# Altium PCB PCB1.PcbDoc
Units mm, origin at the board's own origin, x right, y up, seen from the top; angles counter-clockwise.
Board outline 100 x 70 mm, 2 copper layers (Top Layer, Bottom Layer); 22 components, 25 nets, 103 pads, 10 vias.
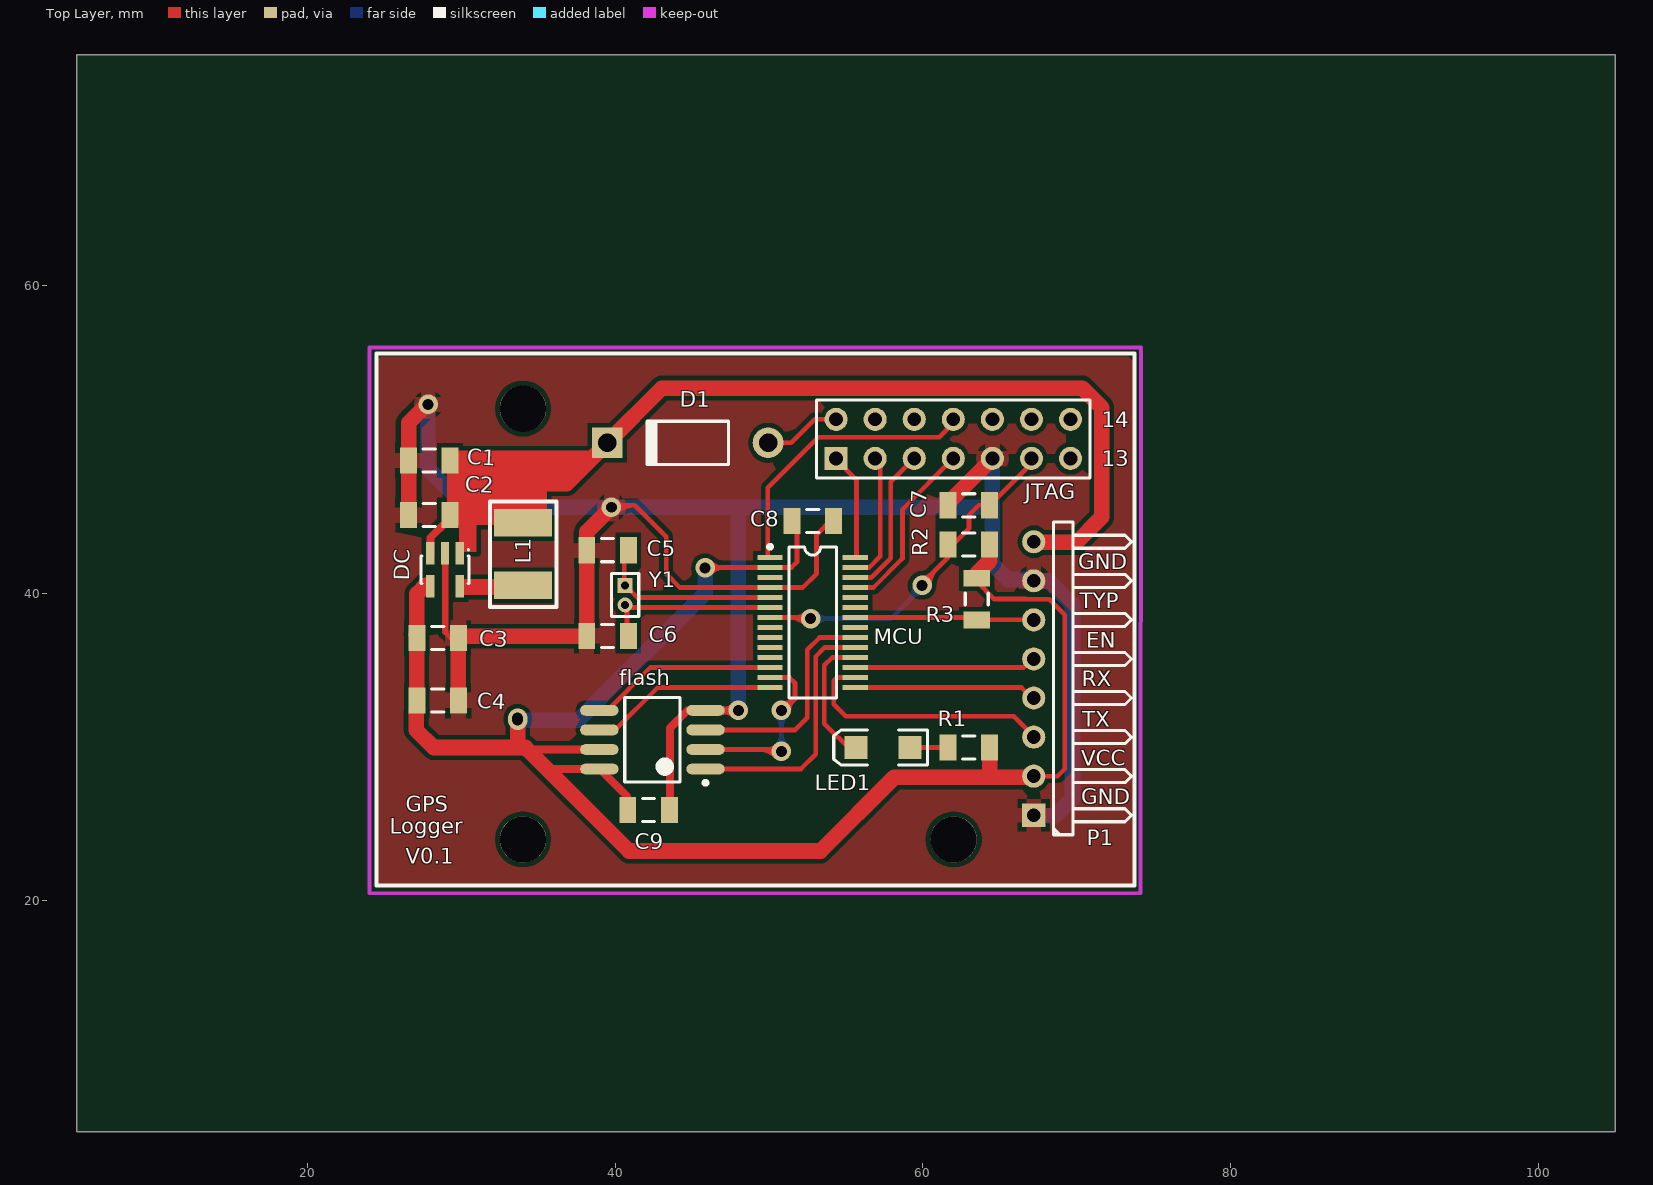
[diagram p0: Top Layer view]
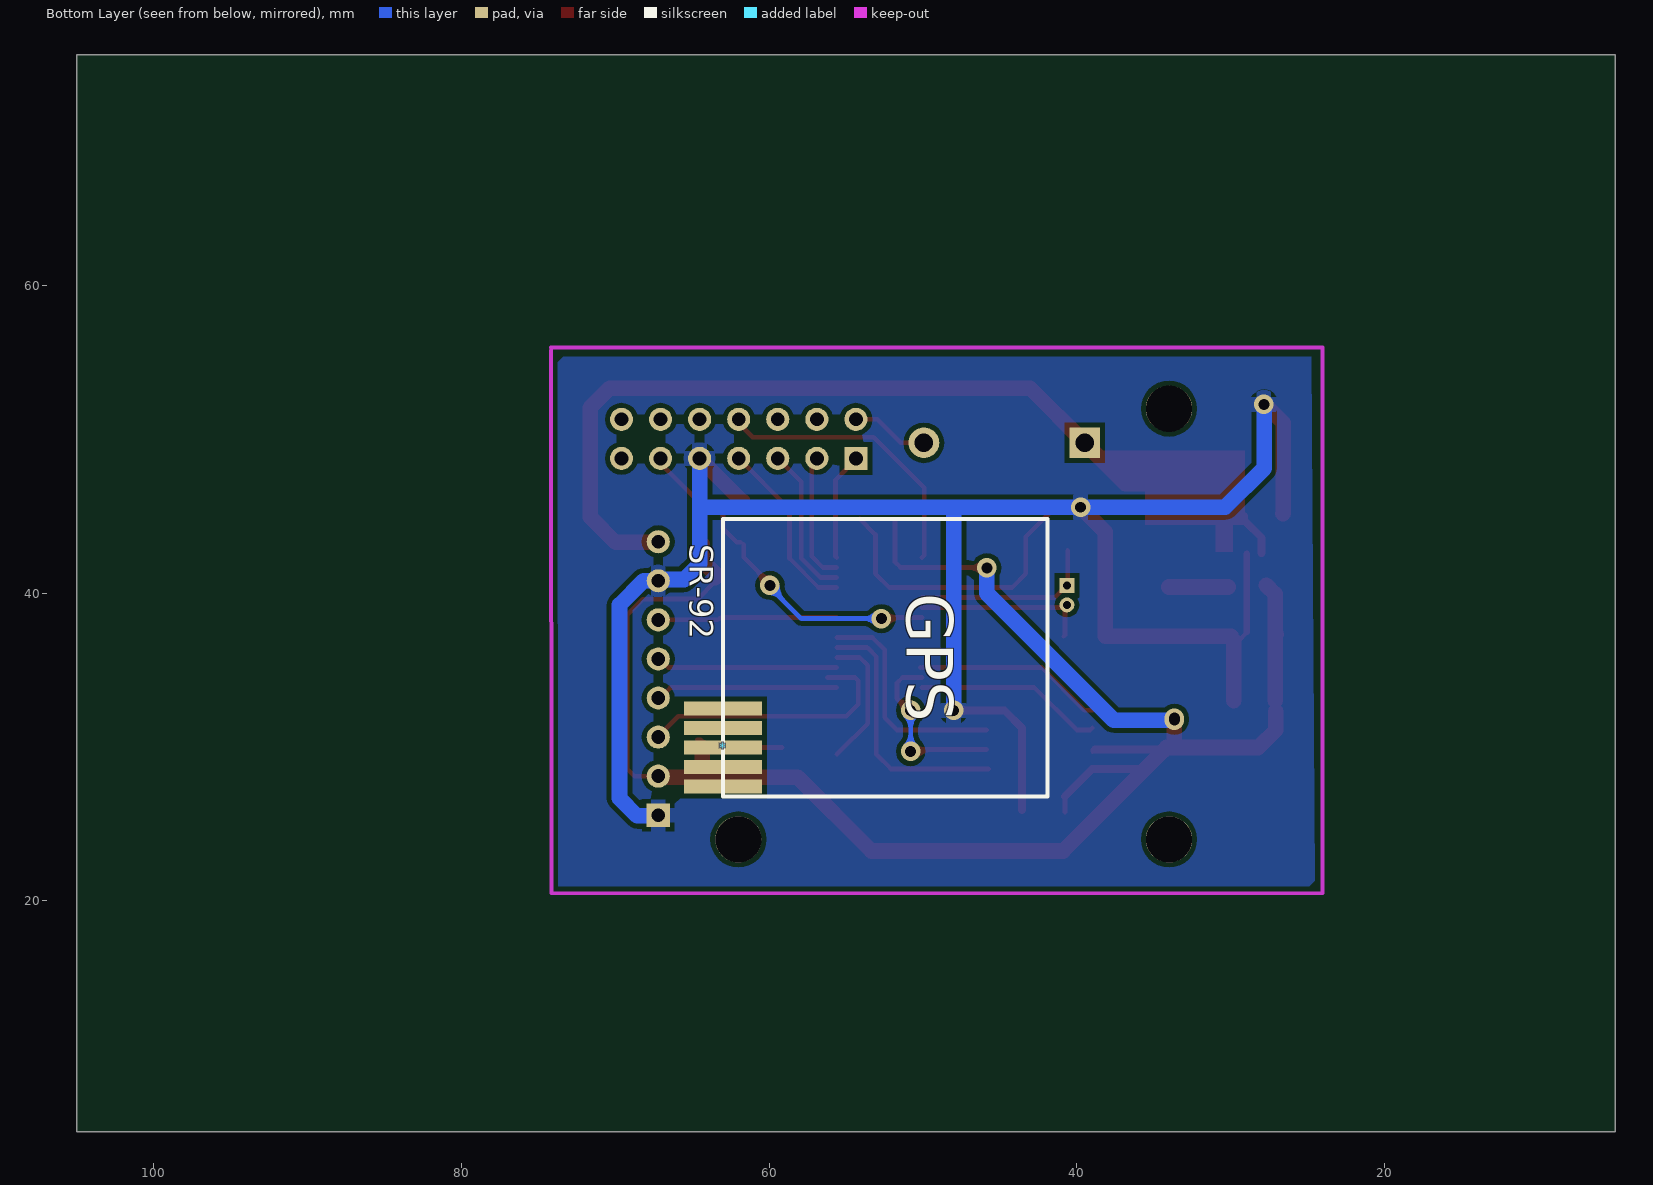
[diagram p1: Bottom Layer view, seen from below]

## Layer stack, top to bottom
Top Layer: signal copper 0.0356
Dielectric: dielectric 0.32, FR-4, Dk 4.8
Bottom Layer: signal copper 0.0356

## Board outline
5,75 105,75 105,5 5,5

## Design rules (kind name [scope] priority, off if disabled: settings)
Clearance Clearance_1 [(InNet('GND'))] p1: gap=0.305
Clearance [All] p2: gap=0.254
PolygonConnect [All] p1: connectstyle=Relief reliefconductorwidth=1 reliefentries=4 polygonreliefangle="90 Angle"
RoutingVias [All] p1: holewidth=0.711 width=1.27 viastyle="Through Hole" minholewidth=0.711 minwidth=1.27 maxholewidth=0.711 maxwidth=1.27
SilkscreenOverComponentPads [All] p1: minsilkscreentomaskgap=0.254
SolderMaskExpansion [All] p1: expansion=0.102
Width [All] p1: maxlimit=2.54 minlimit=0.305 preferedwidth=0.305 minimp=50.000000 maximp=50.000000 favimp=50.000000
27 further rules are at their usual default settings.

## Components (designator, comment, footprint, x,y, rotation, side; value= is the part's Value field where it differs from the comment)
* "Comment" SR-92 62.992,27.432 r270 bottom
C1 "" CAPC3216L 27.915,48.641 r0 top
C2 "" CAPC3216L 27.915,45.085 r0 top
C3 "" CAPC3216L 28.448,37.084 r180 top
C4 "" CAPC3216L 28.448,33.02 r180 top
C5 "" CAPC3216L 39.497,42.799 r0 top
C6 "" CAPC3216L 39.497,37.211 r0 top
C7 "" CAPC3216L 62.992,45.72 r0 top
C8 "" CAPC3216L 52.832,44.704 r180 top
C9 "" CAPC3216L 42.164,25.908 r0 top
D1 "Header 2" DO-41 44.704,49.784 r180 top (schematic designator J1)
DC "TPS61097-33" DBV005 28.931,41.529 r180 top
flash "AT25DF321A" 8S2_M 42.418,30.48 r180 top
JTAG "Debug" HDR2X7 54.356,48.768 r0 top
L1 "DO3314-103MLC" DO3314 34.011,42.545 r90 top
LED1 "LED2" DSO-F2/D6.1 57.404,29.972 r180 top
MCU "MSP430F21X2" PW028 52.832,38.1 r270 top
P1 "Header 8H" HDR1X8H 67.207,25.57 r90 top
R1 "Res3" RESC3216L 62.992,29.972 r180 top
R2 "Res3" RESC3216L 62.992,43.18 r0 top
R3 "Res3" RESC3216L 63.5,39.624 r90 top
Y1 "16M" "DCO - 2" 40.64,40.513 r270 top

## Footprints (in the part's own frame and the unit in brackets; to place one, negate y for a bottom-side part, rotate by r counter-clockwise, add the part's x,y. Pads: shape width x height; smd on the part's side, far side on the other; paste and mask are expansions set on the pad)
8S2_M [mm] "8-Pin Small Outline Package 1.27 mm Pitch, IPC Low Density"
  oval 2.5x0.7 smd: 1(-3.45,1.905) 2(-3.45,0.635) 3(-3.45,-0.635) 4(-3.45,-1.905) 5(3.45,-1.905) 6(3.45,-0.635) 7(3.45,0.635) 8(3.45,1.905)
  silkscreen extent -3.57,-2.75 1.8,2.93, body extent -2.73,-2.75 2.73,2.75, height 2.03
CAPC3216L [mm] "Chip Capacitor, Body 3.2x1.6mm, IPC High Density"
  rect 1.1x1.7 smd: 1(-1.35,0) 2(1.35,0)
  silkscreen extent -0.4,-0.75 0.4,0.75, body extent -1.7,-0.9 1.7,0.9, height 1.3
DBV005 [mm] "SOT-23/SC-74A; 5 Leads; Body 3 x 3 mm, inc. leads (LxW max)"
  rect 0.55x1.45 smd: 1(-0.95,-1.075) 2(0,-1.075) 3(0.95,-1.075) 4(0.95,1.075) 5(-0.95,1.075)
  silkscreen extent -1.58,-1.35 1.55,0.9
"DCO - 2" [mil] "D Crystal Oscillator"
  rect 38.05x38.05 hole 20: 1(0,0)
  round 38.05 hole 20: 2(50,0)
  silkscreen extent -30,-35 80,35
DO3314 [mil]
  rect 70x148 smd: 1(80,0) 2(-80,0)
  silkscreen extent -135,-85 135,85
DO-41 [mm] "Diode, Axial; Body 5.2 x 2.7 mm (LxDia. max), Lead Dia. 0.86 mm (max)"
  round 2 hole 1.2: 1(-5.23,0)
  rect 2x2 hole 1.2: 2(5.23,0)
  silkscreen extent -2.65,-1.4 2.75,1.4
DSO-F2/D6.1 [mm] "SMT LED; 2 Flat Leads"
  rect 1.5x1.5 smd: 1(-1.75,0) 2(1.75,0)
  silkscreen extent -2.9,-1.15 3.2,1.15
HDR1X8H [mm] "Connector; Header; 8 Position; Right Angle"
  rect 1.5x1.5 hole 0.9: 1(0,0)
  round 1.5 hole 0.9: 2(2.54,0) 3(5.08,0) 4(7.62,0) 5(10.16,0) 6(12.7,0) 7(15.24,0) 8(17.78,0)
  silkscreen extent -1.27,-6.35 19.05,-1.27
HDR2X7 [mm] "Connector; Header; 7x2 Position"
  rect 1.5x1.5 hole 0.9: 1(0,0)
  round 1.5 hole 0.9: 2(0,2.54) 3(2.54,0) 4(2.54,2.54) 5(5.08,0) 6(5.08,2.54) 7(7.62,0) 8(7.62,2.54) 9(10.16,0) 10(10.16,2.54) 11(12.7,0) 12(12.7,2.54) 13(15.24,0) 14(15.24,2.54)
  silkscreen extent -1.27,-1.27 16.51,3.81
PW028 [mm]
  rect 0.3x1.65 smd: 1(-4.225,-2.775) 2(-3.575,-2.775) 3(-2.925,-2.775) 4(-2.275,-2.775) 5(-1.625,-2.775) 6(-0.975,-2.775) 7(-0.325,-2.775) 8(0.325,-2.775) 9(0.975,-2.775) 10(1.625,-2.775) 11(2.275,-2.775) 12(2.925,-2.775) 13(3.575,-2.775) 14(4.225,-2.775) 15(4.225,2.775) 16(3.575,2.775) 17(2.925,2.775) 18(2.275,2.775) 19(1.625,2.775) 20(0.975,2.775) 21(0.325,2.775) 22(-0.325,2.775) 23(-0.975,2.775) 24(-1.625,2.775) 25(-2.275,2.775) 26(-2.925,2.775) 27(-3.575,2.775) 28(-4.225,2.775)
  silkscreen extent -5.05,-2.9 4.9,1.55
RESC3216L [mm] "Chip Resistor, Body 3.1x1.6mm, IPC High Density"
  rect 1.1x1.7 smd: 1(-1.35,0) 2(1.35,0)
  silkscreen extent -0.4,-0.75 0.4,0.75, body extent -1.68,-0.87 1.68,0.87, height 2.54
SR-92 [mil] "GPS module SR-92"
  rect 36x200 smd: 1(0,0) 2(-50,0) 3(-100,0) 4(-150,0) 5(-200,0)
  silkscreen extent -685,0 25,830

## Part data
*: library part SR-92
C1 C2 C3 C4 C5 C6 C7 C8 C9: library part "Cap Semi", "Capacitor (Semiconductor SIM Model)"
D1: "Header, 2-Pin"
JTAG: library part "Header 7X2", "Header, 7-Pin, Dual row"
L1: library part "Inductor Iron", "Magnetic-Core Inductor"
LED1: "Typical RED, GREEN, YELLOW, AMBER GaAs LED"
P1: "Header, 8-Pin, Right Angle"
R1 R2 R3: "Resistor"
Y1: library part XTAL, "Crystal Oscillator"

## Free pads (board coordinates)
  round 3 hole 3: 1(34,52) 2(34,24) 3(62,24)

## Via types
v1: diameter 1.27, hole 0.711, Top Layer to Bottom Layer, 10 vias

## Nets (pads, with @x,y where several pads share a name; then routed paths per layer and width w, separated by ;. In a path a pad name is that pad's centre, name@x,y a point inside that pad or via, vN(x,y) a via of type N, cw(c..) or ccw(c..) an arc to the next point about the centre after c; other vN are vias at no path point)
CS: flash.1 MCU.19 | length 16.8
  Top Layer w0.305: flash.1@45.741,28.575 flash.1 52.07,28.575 53.035,29.54 53.035,35.89 53.594,36.449 ; 53.62,36.475 MCU.19
GND: C1.1 C2.1 C3.1 C4.1 C5.1 C6.1 C7.1 C8.1 C9.2 DC.2 flash.4 JTAG.9 MCU.4 P1.1 P1.7 | length 160.1
  Top Layer w0.305: DC.2 DC.2@28.946,42.589 ; 28.946,37.48 28.931,37.465 29.515,36.881 C3.1@29.591,36.881 ; C3.1@29.769,36.982 C3.1@29.798,36.953 ; C6.1@37.973,37.186 37.998,37.211 C6.1@38.147,37.36 ; v1@39.751,45.72 41.275,45.72 43.307,43.688 43.307,41.275 44.207,40.375 MCU.4 ; v1@39.877,45.467 cw(c40.487,44.857) 40.487,45.72 ; v1@40.092,45.252 cw(c41.223,44.121) 41.223,45.72 ; v1@40.092,45.934 ccw(c40.609,46.451) 40.609,45.72 ; C9.2 C9.2@43.561,25.908 ; flash.4@45.847,32.385 flash.4 ; MCU.4@50.444,40.375 MCU.4 ; C8.1@54.102,44.831 53.086,43.815 53.086,41.275 52.186,40.375 MCU.4 ; JTAG.9@64.342,48.721 JTAG.9@64.516,48.895 ; JTAG.9@64.516,48.514 JTAG.9 JTAG.9@64.516,48.641
  Top Layer w0.406: 28.946,37.48 DC.2@28.946,42.589
  Top Layer w0.508: C9.2@43.561,25.908 43.561,31.242 44.704,32.385 flash.4 v1(48.006,32.385) ; v1@47.737,32.116 ccw(c47.086,31.465) 47.086,32.385 ccw(c47.086,33.305) v1@47.737,32.654
  Top Layer w1.016: C2.1@26.594,45.187 26.565,45.216 C1.1 26.565,51.076 v1@27.8,52.311 ; C4.1 C3.1@29.798,36.953 ; C3.1@29.972,37.211 37.998,37.211 C6.1 ; C6.1@38.147,37.36 C5.1 38.147,43.989 v1(39.751,45.593) ; C7.1@61.722,45.72 61.722,45.974 JTAG.9 ; JTAG.9@64.643,48.641 JTAG.9 ; JTAG.9@64.643,48.895 JTAG.9 ; P1.7@67.183,40.767 P1.7@67.246,40.831 ; P1.7@67.31,40.767 P1.7@67.246,40.831 ; P1.7@67.31,40.894 P1.7@67.246,40.831
  Bottom Layer w1.016: v1@27.813,52.273 27.813,48.133 30.353,45.593 v1(39.751,45.593) 48.006,45.593 ; v1(48.006,32.385) 48.006,45.593 ; 64.262,45.593 48.006,45.593 ; 64.516,41.91 65.532,40.894 P1.7@67.183,40.894 ; 64.516,42.037 JTAG.9 ; P1.1@67.183,25.527 68.58,25.527 69.723,26.67 69.723,39.243 68.156,40.81 P1.7 ; P1.7@67.207,40.767 P1.7@67.437,40.767
  other v1: 27.838,52.273
GSP_EN: MCU.17 P1.5 | length 11.8
  Top Layer w0.305: MCU.17 66.544,35.175 P1.5@67.132,35.763
JTAG_3.3V: D1.1 JTAG.2 | length 5
  Top Layer w0.305: D1.1 51.435,49.784 52.959,51.308 JTAG.2@54.229,51.308
  Top Layer w1.016: JTAG.2@54.28,51.333 JTAG.2@54.305,51.359
LED1: LED1.2 MCU.18 | length 8.8
  Top Layer w0.305: LED1.2@55.588,29.527 55.399,29.717 53.594,31.521 53.594,35.306 54.113,35.825 MCU.18
MCU_RX: MCU.16 P1.3 | length 17.5
  Top Layer w0.305: MCU.16@56.21,34.525 MCU.16 54.413,34.525 54.204,34.315 54.204,32.791 54.991,32.004 65.913,32.004 P1.3@67.234,30.683
MCU_TX: MCU.15 P1.4 | length 11.9
  Top Layer w0.305: MCU.15 66.404,33.875 67.148,33.131 P1.4@67.158,33.122
NetC5_2: C5.2 MCU.5 Y1.1 | length 12.2
  Top Layer w0.305: Y1.1@40.593,40.386 40.593,40.513 C5.2@40.593,42.799 ; Y1.1 41.428,39.725 MCU.5
NetC6_2: C6.2 MCU.6 Y1.2 | length 11.4
  Top Layer w0.305: Y1.2@40.513,39.243 40.576,39.179 Y1.2@40.681,39.075 ; C6.2 40.767,37.291 40.767,39.075 MCU.6
NetDC_5: DC.5 L1.2 | length 3.9
  Top Layer w1.016: DC.5@30.15,40.411 L1.2@34.011,40.411
NetLED1_1: LED1.1 R1.2 | length 2.3
  Top Layer w0.305: LED1.1 61.29,29.972 R1.2@61.392,29.87
NetMCU_22: 
POWER: C1.2 C2.2 D1.2 DC.1 DC.3 L1.1 P1.8 | length 55.2
  Top Layer w0.406: C2.2@29.058,44.679 C2.2@29.058,45.034
  Top Layer w0.508: DC.3 27.981,43.602 C2.2@29.058,44.679
  Top Layer w1.016: 34.671,47.117 36.83,47.117 39.37,49.657 39.37,49.784 D1.2@39.37,49.911 ; D1.2 43.03,53.34 70.358,53.34 71.628,52.07 71.628,44.958 69.977,43.307 P1.8@67.31,43.307
  Bottom Layer w1.016: P1.8@67.148,43.409 P1.8
RST: C7.2 JTAG.11 MCU.7 R2.1 | length 39.5
  Top Layer w0.305: MCU.7 v1@52.649,38.425 ; v1@59.944,40.64 61.642,42.338 R2.1 ; R2.1@61.849,43.307 62.103,43.307 62.992,44.196 62.992,45.085 63.627,45.72 C7.2 67.056,48.434 JTAG.11 ; JTAG.11@67.132,48.743 67.107,48.768 JTAG.11@67.158,48.819 ; 51.368,38.425 cw(c51.368,37.017) 52.364,38.013 ccw(c51.368,37.017) 51.368,38.425 ; 51.711,38.425 ccw(c51.711,39.348) 52.364,38.695 cw(c51.711,39.348) 51.711,38.425 ; v1@59.944,40.996 ccw(c59.944,41.854) 60.551,41.247 cw(c59.944,41.854) v1@59.944,40.996 ; v1@60.122,40.513 cw(c60.858,40.513) 60.337,41.033 ccw(c60.858,40.513) v1@60.122,40.513 ; v1@60.427,40.513 cw(c61.898,40.513) 60.858,41.554 ccw(c61.898,40.513) v1@60.427,40.513
  Bottom Layer w0.305: v1(52.705,38.354) 57.912,38.354 60.008,40.45 v1@60.071,40.513 ; v1(59.944,40.513) v1@60.071,40.64 ; 53.87,38.354 cw(c53.87,39.519) 53.046,38.695 ccw(c53.87,39.519) 53.87,38.354 ; 53.87,38.354 ccw(c53.87,37.189) 53.046,38.013 cw(c53.87,37.189) 53.87,38.354 ; 59.03,39.472 ccw(c57.99,40.513) 59.461,40.513 cw(c57.99,40.513) 59.03,39.472 ; 59.337,39.779 cw(c59.944,39.172) 59.944,40.03 ccw(c59.944,39.172) 59.337,39.779 ; 59.551,39.993 ccw(c59.03,40.513) 59.766,40.513 cw(c59.03,40.513) 59.551,39.993
SCK: flash.6 MCU.14 | length 12.3
  Top Layer w0.305: flash.6@38.989,31.242 39.042,31.189 39.116,31.115 40.005,31.115 42.765,33.875 MCU.14
SIMO: flash.5 MCU.12 | length 12.2
  Top Layer w0.305: flash.5 39.497,32.385 42.291,35.179 MCU.12@50.038,35.179
SOMI: flash.2 MCU.13 | length 27.1
  Top Layer w0.305: flash.2 50.8,29.845 50.927,29.845 v1(50.8,29.718) ; MCU.13 51.327,34.525 51.689,34.163 51.689,33.147 ; v1@50.927,32.385 51.689,33.147 ; 51.689,33.147 cw(c50.986,33.85) 50.861,32.864 ccw(c50.986,33.85) 51.689,33.147 ; 49.328,29.845 cw(c49.328,28.246) 50.459,29.377 ccw(c49.328,28.246) 49.328,29.845 ; 49.942,29.845 ccw(c49.942,30.576) 50.459,30.059 cw(c49.942,30.576) 49.942,29.845 ; 50.064,29.845 cw(c50.064,28.982) 50.674,29.592 ccw(c50.064,28.982) 50.064,29.845 ; v1@51.283,32.385 cw(c52.141,32.385) 51.534,32.992 ccw(c52.141,32.385) v1@51.283,32.385
  Bottom Layer w0.305: v1@50.673,29.972 50.8,30.099 v1(50.8,32.385) ; 50.8,30.883 cw(c49.635,30.883) 50.459,30.059 ccw(c49.635,30.883) 50.8,30.883 ; 50.8,30.883 ccw(c51.965,30.883) 51.141,30.059 cw(c51.965,30.883) 50.8,30.883 ; 50.8,31.22 cw(c51.965,31.22) 51.141,32.044 ccw(c51.965,31.22) 50.8,31.22 ; 50.8,31.22 ccw(c49.635,31.22) 50.459,32.044 cw(c49.635,31.22) 50.8,31.22
TCK: JTAG.7 MCU.25 | length 11.9
  Top Layer w0.305: MCU.25 56.787,40.375 58.674,42.262 58.674,45.466 JTAG.7 JTAG.7@61.976,48.946
TDI: JTAG.3 MCU.27 | length 8.5
  Top Layer w0.305: MCU.27 56.507,41.675 57.226,42.394 57.226,48.514 56.934,48.806 JTAG.3@56.896,48.844
TDO: JTAG.1 MCU.28 | length 7.1
  Top Layer w0.305: JTAG.1@54.254,48.793 54.318,48.73 55.677,47.371 55.677,42.395 MCU.28
TEST: JTAG.8 MCU.1 | length 18.7
  Top Layer w0.305: MCU.1 49.911,42.471 49.911,46.863 53.2,50.152 ; 53.213,50.152 61.074,50.152 61.976,51.054 JTAG.8 ; JTAG.8@61.951,51.206 JTAG.8@61.951,51.283
TMS: JTAG.5 MCU.26 | length 10
  Top Layer w0.305: MCU.26 55.611,41.021 56.643,41.021 57.912,42.29 57.912,47.244 JTAG.5 JTAG.5@59.436,48.87
TYPE: MCU.22 P1.6 R3.1 | length 11.5
  Top Layer w0.305: MCU.22 R3.1@63.119,38.425 ; R3.1@63.246,38.354 63.33,38.27 63.5,38.27 P1.6
VCC: C3.2 C4.2 C8.2 C9.1 DC.4 flash.7 flash.8 MCU.2 P1.2 R1.1 R2.2 R3.2 | length 121.5
  Top Layer w0.305: flash.7@38.795,29.87 flash.7@38.82,29.845 ; C9.1@40.767,25.781 40.767,25.908 40.767,26.797 ; v1@45.72,41.675 45.847,41.675 MCU.2 51.454,41.675 51.816,42.037 C8.2@51.816,44.704 ; R3.2@63.5,40.767 64.643,39.624 66.686,39.624 66.707,39.603 68.22,39.603 69.215,38.608 69.215,28.575 68.75,28.11 P1.2 ; 64.342,28.042 64.342,27.987 64.389,27.94 ; R1.1@64.44,30.48 R1.1@64.668,30.48 ; P1.2@66.98,28.169 67.207,28.169 P1.2@67.234,28.169 ; flash.7@38.82,29.845 flash.7 38.968,29.697 38.894,29.771 flash.7@38.82,29.845 ; v1@46.188,41.315 cw(c47.058,40.445) 47.058,41.675 ccw(c47.058,40.445) v1@46.188,41.315 ; v1@46.188,41.997 ccw(c46.966,42.775) 46.966,41.675 cw(c46.966,42.775) v1@46.188,41.997
  Top Layer w0.508: 34.29,29.845 flash.7@38.82,29.845 ; 35.814,28.575 flash.8 ; flash.8@38.968,28.596 38.978,28.586 40.767,26.797
  Top Layer w1.016: C3.2@27.026,37.338 27.098,37.266 C3.2 C4.2 ; C4.2@27.051,32.334 27.051,31.115 28.194,29.972 33.655,29.972 ; C3.2@27.102,37.516 27.102,39.954 27.673,40.526 ; v1(33.655,31.877) v1(33.655,31.75) 33.655,29.972 ; R3.2@63.5,41.021 63.5,41.275 64.342,42.117 R2.2 ; R1.1 64.342,28.042 58.141,28.042 53.34,23.241 40.894,23.241 34.29,29.845 34.163,29.972 33.655,29.972 ; 64.389,28.042 P1.2@67.207,28.042
  Bottom Layer w1.016: v1(33.655,31.75) 37.592,31.75 45.847,40.005 v1@45.847,41.529
  other v1: 45.847,41.656
WP: flash.3 MCU.20 | length 14.8
  Top Layer w0.305: flash.3 flash.3@45.999,31.115 ; flash.3@46.02,31.094 flash.3@45.999,31.115 ; MCU.20 53.279,37.125 52.476,36.322 52.476,31.902 51.689,31.115 flash.3@45.999,31.115
pads on no net: *.1 *.2 *.3 *.4 *.5 JTAG.4 JTAG.6 JTAG.10 JTAG.12 JTAG.13 JTAG.14 MCU.3 MCU.8 MCU.9 MCU.10 MCU.11 MCU.21 MCU.23 MCU.24

## Polygon pours and split planes (outlines as drawn)
GND on Top Layer "Top Layer-No Net" (solid, remove dead copper, pour order 1002): 73.787,21.082 73.787,38.227 70.866,41.148 55.499,41.148 55.499,34.798 54.61,33.909 54.356,33.655 52.451,33.655 52.324,33.528 52.324,28.956 51.181,28.956 49.276,27.051 49.022,26.797 49.022,24.257 39.116,24.257 34.163,29.21 34.163,29.845 28.448,29.845 27.559,30.734 27.051,31.242 27.051,40.132 25.019,40.132 24.511,40.64 24.511,21.082
GND on Top Layer "Top Layer-No Net" (solid, remove dead copper, pour order 1001): 24.384,21.082 24.384,40.386 24.511,40.513 24.638,40.64 38.481,40.64 49.784,40.64 50.038,40.386 50.292,40.132 50.292,33.909 42.799,33.909 42.037,33.147 42.037,20.955
GND on Top Layer "Top Layer-No Net" (solid, remove dead copper, pour order 1000): 24.511,55.626 24.765,55.372 73.787,55.372 73.787,35.687 73.66,35.56 55.499,35.56 55.499,47.752 54.483,48.768 54.356,48.895 54.356,50.165 53.213,50.165 53.086,50.038 49.911,46.863 49.784,46.863 49.784,40.132 49.911,40.005 49.657,39.751 24.511,39.751
GND on Bottom Layer "Top Layer-No Net" (solid, remove dead copper, pour order 1003): 24.765,55.372 73.406,55.372 73.66,55.118 73.787,54.991 73.787,21.082 73.787,20.955 24.511,20.955

## Keep-outs
Keep-Out Layer:
  lines w0.254: 74.186,55.778 74.149,20.5 24.028,20.5 24.028,55.982 74.193,55.982

## Other copper
Top Layer:
  rectangle net POWER: 35.433,47.371 37.592,48.768
  rectangle net POWER: 35.433,48.387 38.735,49.276
  rectangle net POWER: 29.058,44.45 35.56,49.276
  rectangle net POWER: 29.845,42.672 30.988,44.704

## Silkscreen, mask and mechanical layers (free items; w line width, h text height)
Top Overlay:
  lines w0.254: 24.486,21 24.486,55.575 73.762,55.575 73.762,21 24.486,21
  text "GND" at 70.103,41.572 h1.02
  text "TYP" at 70.204,39.032 h1.02
  text "EN" at 70.612,36.449 h1.02
  text "RX" at 70.331,33.952 h1.02
  text "TX" at 70.357,31.31 h1.02
  text "VCC" at 70.306,28.796 h1.02
  text "GND" at 70.281,26.281 h1.02
  text "GPS" at 26.365,25.806 h1
  text "Logger" at 25.324,24.359 h1
  text "V0.1" at 26.365,22.428 h1

## Text inside footprints (layer, text, board x,y; h text height)
*: Bottom Overlay "GPS" at 51.054,40.005 h3.05 r90; Bottom Overlay "SR-92" at 65.151,43.18 h1.52 r90
JTAG: Top Overlay "13" at 71.628,48.26 h1.02; Top Overlay "14" at 71.628,50.8 h1.02